# Altium PCB LKS_Motor_0406.PcbDoc (part 4 of 4)
Units mm, origin at the board's own origin, x right, y up, seen from the top; angles counter-clockwise.
Board outline 117 x 10 mm, 2 copper layers (Top Layer, Bottom Layer); 114 components, 77 nets, 340 pads, 169 vias.
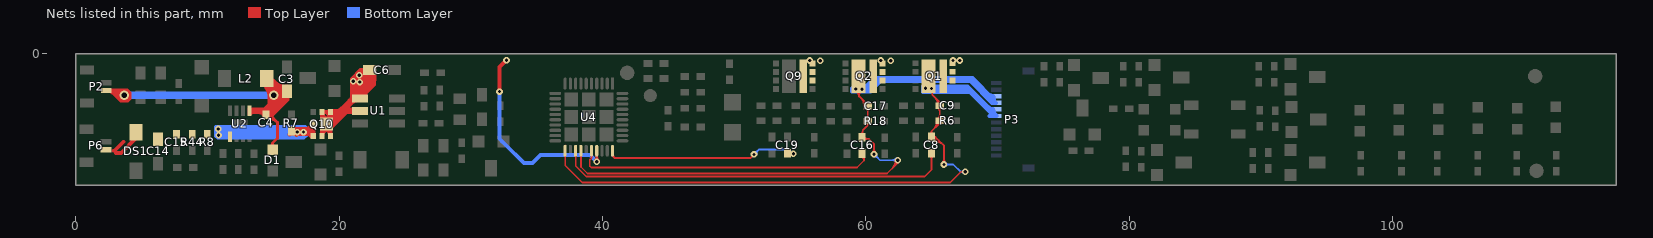
[diagram p4: the nets of this part, all layers, seen from the top]

## Via types
v1: diameter 0.5, hole 0.25, Top Layer to Bottom Layer, 167 vias
v2: diameter 0.7, hole 0.4, Top Layer to Bottom Layer, 2 vias

## Nets (pads, with @x,y where several pads share a name; then routed paths per layer and width w, separated by ;. In a path a pad name is that pad's centre, name@x,y a point inside that pad or via, vN(x,y) a via of type N, cw(c..) or ccw(c..) an arc to the next point about the centre after c; other vN are vias at no path point) (continued)
V: C16.1 C17.1 P3.3 P3.4 Q2.10 R18.2 U4.24 | length 121.5
  Top Layer w0.127: U4.24@38.367,-7.361 38.367,-8.598 38.862,-9.093 61.62,-9.093 62.433,-8.28 v1(62.433,-8.077) ; C16.1@59.866,-6.35 C16.1@59.866,-6.366 ; C16.1@59.882,-6.35 C16.1@59.866,-6.366 ; v1(60.63,-7.62) 60.63,-6.833 60.274,-6.477 ; 38.367,-7.827 cw(c38.503,-7.827) 38.407,-7.731 ccw(c38.503,-7.827) 38.367,-7.827 ; 38.367,-7.827 ccw(c38.231,-7.827) 38.327,-7.731 cw(c38.231,-7.827) 38.367,-7.827 ; 59.464,-3.178 cw(c59.802,-3.178) 59.661,-2.871 ccw(c59.802,-3.178) 59.464,-3.178 ; 59.464,-3.178 ccw(c59.126,-3.178) 59.267,-2.871 cw(c59.126,-3.178) 59.464,-3.178 ; 59.464,-3.178 60.146,-3.859 C17.1@60.146,-3.978 R18.2@60.146,-5.121 60.146,-5.436 ; 59.464,-3.178 Q2.10@59.464,-1.707 ; 59.464,-2.979 cw(c59.711,-2.979) 59.607,-2.755 ccw(c59.711,-2.979) 59.464,-2.979 ; 59.464,-2.979 ccw(c59.217,-2.979) 59.321,-2.755 cw(c59.217,-2.979) 59.464,-2.979 ; Q2.10@59.464,-1.707 ccw(c60.605,-1.707) 59.84,-2.554 cw(c60.605,-1.707) Q2.10@59.464,-1.707 ; Q2.10@59.464,-1.707 cw(c58.339,-1.707) 59.106,-2.53 ccw(c58.339,-1.707) Q2.10@59.464,-1.707 ; 59.765,-5.817 cw(c59.399,-5.817) 59.607,-6.117 ccw(c59.399,-5.817) 59.765,-5.817 ; 59.765,-5.817 60.146,-5.436 ; 59.765,-5.817 59.765,-6.264 C16.1@59.866,-6.366 ; 59.978,-6.477 cw(c59.978,-6.404) 59.905,-6.41 ccw(c59.978,-6.404) 59.978,-6.477 ; 59.978,-6.477 ccw(c59.978,-6.602) 59.873,-6.532 cw(c59.978,-6.602) 59.978,-6.477 ; 59.978,-6.477 60.274,-6.477 ; 60.146,-5.436 cw(c60.31,-5.436) 60.234,-5.29 ccw(c60.31,-5.436) 60.146,-5.436 ; 60.146,-5.436 ccw(c59.981,-5.436) 60.057,-5.29 cw(c59.981,-5.436) 60.146,-5.436 ; 60.146,-4.661 cw(c59.686,-4.661) 60.011,-4.986 ccw(c59.686,-4.661) 60.146,-4.661 ; 60.146,-4.661 ccw(c60.606,-4.661) 60.28,-4.986 cw(c60.606,-4.661) 60.146,-4.661 ; 60.146,-4.438 cw(c60.606,-4.438) 60.28,-4.113 ccw(c60.606,-4.438) 60.146,-4.438 ; 60.146,-4.438 ccw(c59.686,-4.438) 60.011,-4.113 cw(c59.686,-4.438) 60.146,-4.438 ; 60.274,-6.477 cw(c60.274,-5.9) 59.854,-6.296 ccw(c60.274,-5.9) 60.274,-6.477 ; 60.63,-7.17 cw(c60.18,-7.17) 60.498,-7.488 ccw(c60.18,-7.17) 60.63,-7.17 ; 60.63,-7.17 ccw(c61.08,-7.17) 60.762,-7.488 cw(c61.08,-7.17) 60.63,-7.17 ; Q2.10@59.179,-2.846 cw(c59.066,-3.228) 59.464,-3.228 ccw(c59.066,-3.228) Q2.10@59.179,-2.846 ; Q2.10@59.192,-2.623 ccw(c58.611,-1.999) 59.464,-1.999 cw(c58.611,-1.999) Q2.10@59.192,-2.623 ; Q2.10@59.216,-2.724 cw(c59.116,-3.057) 59.464,-3.057 ccw(c59.116,-3.057) Q2.10@59.216,-2.724 ; Q2.10@59.252,-2.602 cw(c59.167,-2.887) 59.464,-2.887 ccw(c59.167,-2.887) Q2.10@59.252,-2.602 ; Q2.10@59.279,-2.716 ccw(c58.883,-2.291) 59.464,-2.291 cw(c58.883,-2.291) Q2.10@59.279,-2.716 ; 59.464,-3.239 cw(c59.837,-3.239) 59.756,-2.874 ccw(c59.837,-3.239) 59.464,-3.239 ; 59.464,-3.08 cw(c59.802,-3.08) 59.728,-2.75 ccw(c59.802,-3.08) 59.464,-3.08 ; Q2.10@59.464,-2.922 cw(c59.767,-2.922) 59.701,-2.627 ccw(c59.767,-2.922) Q2.10@59.464,-2.922 ; Q2.10@59.464,-2.85 ccw(c59.573,-2.85) 59.5,-2.931 cw(c59.573,-2.85) Q2.10@59.464,-2.85 ; Q2.10@59.464,-2.763 cw(c59.731,-2.763) 59.673,-2.503 ccw(c59.731,-2.763) Q2.10@59.464,-2.763 ; Q2.10@59.464,-2.605 cw(c59.696,-2.605) 59.645,-2.379 ccw(c59.696,-2.605) Q2.10@59.464,-2.605 ; Q2.10@59.464,-2.564 ccw(c59.831,-2.564) 59.585,-2.837 cw(c59.831,-2.564) Q2.10@59.464,-2.564 ; Q2.10@59.464,-2.279 ccw(c60.089,-2.279) 59.67,-2.743 cw(c60.089,-2.279) Q2.10@59.464,-2.279 ; Q2.10@59.464,-1.993 ccw(c60.347,-1.993) 59.755,-2.648 cw(c60.347,-1.993) Q2.10@59.464,-1.993 ; 59.606,-3.32 cw(c58.948,-3.978) 59.879,-3.978 ccw(c58.948,-3.978) 59.606,-3.32 ; C16.1@59.762,-6.383 ccw(c59.98,-6.177) 59.98,-6.477 cw(c59.98,-6.177) C16.1@59.762,-6.383 ; 59.765,-5.933 ccw(c60.057,-5.933) 59.85,-6.139 cw(c60.057,-5.933) 59.765,-5.933 ; 59.823,-3.537 cw(c59.382,-3.978) 60.006,-3.978 ccw(c59.382,-3.978) 59.823,-3.537 ; C16.1@59.85,-6.561 cw(c60.053,-6.763) 60.053,-6.477 ccw(c60.053,-6.763) C16.1@59.85,-6.561 ; 61.971,-8.742 ccw(c61.306,-8.077) 62.247,-8.077 cw(c61.306,-8.077) 61.971,-8.742 ; 62.188,-8.526 ccw(c61.739,-8.077) 62.374,-8.077 cw(c61.739,-8.077) 62.188,-8.526
  Bottom Layer w0.127: v1(60.63,-7.62) 61.087,-8.077 v1(62.433,-8.077) ; 60.948,-7.938 cw(c61.267,-7.62) 60.816,-7.62 ccw(c61.267,-7.62) 60.948,-7.938 ; 60.948,-7.938 ccw(c60.63,-8.257) 60.63,-7.806 cw(c60.63,-8.257) 60.948,-7.938 ; 61.983,-8.077 cw(c61.983,-8.527) 62.301,-8.209 ccw(c61.983,-8.527) 61.983,-8.077 ; 61.983,-8.077 ccw(c61.983,-7.627) 62.301,-7.945 cw(c61.983,-7.627) 61.983,-8.077
  Bottom Layer w0.3: v1@59.258,-2.692 60.173,-2.692 ; 61.214,-2.083 61.138,-2.083 60.35,-2.87 ; 65.583,-2.083 65.38,-2.083 ; 67.716,-2.083 67.31,-2.083 ; 68.297,-2.083 67.945,-2.083 ; 68.682,-2.642 69.262,-3.222 ; 68.834,-2.794 67.894,-1.854 ; P3.3@69.647,-3.222 69.262,-3.222 ; P3.4@69.901,-3.722 P3.4@69.762,-3.722 ; 59.131,-2.438 cw(c59.131,-2.997) 59.627,-2.739 ccw(c59.131,-2.997) 59.131,-2.438 ; 59.131,-2.438 58.953,-2.616 58.953,-2.87 60.35,-2.87 ; 59.131,-2.438 60.071,-2.438 ; v1@59.304,-2.596 ccw(c59.965,-1.935) 59.965,-2.87 cw(c59.965,-1.935) v1@59.304,-2.596 ; v1@59.304,-2.596 ccw(c59.536,-2.364) 59.536,-2.692 cw(c59.536,-2.364) v1@59.304,-2.596 ; 60.071,-2.438 ccw(c60.071,-2.694) 59.815,-2.693 cw(c60.071,-2.694) 60.071,-2.438 ; 60.071,-2.438 60.071,-2.591 60.173,-2.692 ; 60.071,-2.438 60.655,-1.854 65.71,-1.854 67.615,-1.854 ; 60.173,-2.692 60.782,-2.083 65.38,-2.083 ; 60.35,-2.87 cw(c60.35,-2.106) 59.789,-2.625 ccw(c60.35,-2.106) 60.35,-2.87 ; 65.38,-2.083 67.31,-2.083 ; 67.31,-2.083 67.945,-2.083 ; 67.615,-1.854 68.097,-1.854 69.762,-3.518 P3.4@69.762,-3.722 ; 67.615,-1.854 67.894,-1.854 ; 67.894,-1.854 69.262,-3.222 ; 67.945,-2.083 69.584,-3.722 P3.4@69.762,-3.722 ; 69.262,-3.222 P3.4@69.762,-3.722 ; 69.301,-3.058 ccw(c69.66,-2.7) P3.3@69.66,-3.207 ; 69.301,-3.058 ccw(c69.66,-2.7) P3.3@69.66,-3.207 ; 69.301,-3.058 ccw(c69.66,-2.7) P3.3@69.66,-3.207 ; 69.301,-3.058 ccw(c69.66,-2.7) P3.3@69.66,-3.207 ; P3.4@69.644,-3.722 ccw(c68.871,-3.722) 69.418,-3.175 cw(c68.871,-3.722) P3.4@69.644,-3.722 ; P3.4@69.644,-3.722 ccw(c69.361,-3.722) 69.562,-3.522 cw(c69.361,-3.722) P3.4@69.644,-3.722 ; P3.3@69.649,-3.232 cw(c69.377,-3.505) 69.762,-3.505 ; P3.3@69.649,-3.232 cw(c69.377,-3.505) 69.762,-3.505 ; P3.3@69.649,-3.232 cw(c69.377,-3.505) 69.762,-3.505 ; P3.3@69.649,-3.232 cw(c69.377,-3.505) 69.762,-3.505 ; 59.045,-2.87 ccw(c59.045,-2.022) 59.645,-2.622 cw(c59.045,-2.022) 59.045,-2.87 ; v1@59.304,-2.738 cw(c60.026,-3.46) 60.026,-2.438 ccw(c60.026,-3.46) v1@59.304,-2.738 ; v1@59.515,-2.692 cw(c59.77,-2.693) 59.77,-2.438 ccw(c59.77,-2.693) v1@59.515,-2.692 ; v1@59.6,-2.529 cw(c59.801,-2.814) 60.048,-2.567 ccw(c59.801,-2.814) v1@59.6,-2.529 ; 59.626,-2.438 cw(c59.626,-2.739) 59.893,-2.6 ccw(c59.626,-2.739) 59.626,-2.438 ; v1@59.642,-2.506 cw(c59.79,-2.884) 60.077,-2.597 ccw(c59.79,-2.884) v1@59.642,-2.506 ; v1@59.773,-2.774 cw(c60.009,-3.11) 60.3,-2.819 ccw(c60.009,-3.11) v1@59.773,-2.774 ; 69.467,-3.427 ccw(c69.66,-3.233) 69.662,-3.506 cw(c69.66,-3.233) 69.467,-3.427 ; P3.4@69.505,-3.642 ccw(c69.66,-3.487) 69.66,-3.707 cw(c69.66,-3.487) P3.4@69.505,-3.642
  other v1: 59.715,-2.692 59.233,-2.667
VB1: C19.2 U4.30 | length 19.3
  Top Layer w0.15: U4.30@40.767,-7.208 40.767,-7.747 40.919,-7.899 51.257,-7.899 v1(51.511,-7.645) ; C19.2@54.051,-7.544 cw(c54.051,-7.945) 54.369,-7.701 ccw(c54.051,-7.945) C19.2@54.051,-7.544 ; C19.2@54.051,-7.544 v1@54.458,-7.544 ; v1@54.458,-7.544 cw(c54.458,-7.172) 54.183,-7.423 ccw(c54.458,-7.172) v1@54.458,-7.544 ; v1@54.458,-7.544 ccw(c54.458,-7.916) 54.183,-7.665 cw(c54.458,-7.916) v1@54.458,-7.544 ; U4.30@40.812,-7.691 ccw(c41.057,-7.691) 40.884,-7.864 cw(c41.057,-7.691) U4.30@40.812,-7.691 ; C19.2@54.209,-7.544 ccw(c54.209,-7.295) 54.385,-7.471 cw(c54.209,-7.295) C19.2@54.209,-7.544
  Bottom Layer w0.127: v1(51.511,-7.645) 51.892,-7.264 54.178,-7.264 v1(54.508,-7.595) ; 51.83,-7.327 cw(c51.511,-7.009) 51.511,-7.459 ccw(c51.511,-7.009) 51.83,-7.327 ; 51.83,-7.327 ccw(c52.148,-7.645) 51.698,-7.645 cw(c52.148,-7.645) 51.83,-7.327
VB2: C16.2 U4.26 | length 26.4
  Top Layer w0.127: U4.26@39.167,-7.208 39.167,-7.925 39.04,-8.052 39.04,-8.534 39.141,-8.636 59.333,-8.636 59.866,-8.103 C16.2@59.866,-7.636 ; 39.167,-7.827 cw(c39.303,-7.827) 39.207,-7.731 ccw(c39.303,-7.827) 39.167,-7.827 ; 39.167,-7.827 ccw(c39.031,-7.827) 39.127,-7.731 cw(c39.031,-7.827) 39.167,-7.827 ; C16.2@59.652,-7.825 cw(c59.547,-8.127) 59.866,-8.127 ccw(c59.547,-8.127) C16.2@59.652,-7.825 ; C16.2@59.694,-7.705 cw(c59.609,-7.948) 59.866,-7.948 ccw(c59.609,-7.948) C16.2@59.694,-7.705
  Top Layer w0.15: 59.866,-8.026 C16.2@59.866,-7.636 ; C16.2@59.677,-7.82 cw(c59.626,-8.055) 59.866,-8.055 ccw(c59.626,-8.055) C16.2@59.677,-7.82 ; C16.2@59.709,-7.674 cw(c59.667,-7.869) 59.866,-7.869 ccw(c59.667,-7.869) C16.2@59.709,-7.674
VB3: C8.2 U4.23 | length 31.9
  Top Layer w0.127: U4.23@37.967,-7.361 37.967,-8.528 38.76,-9.322 64.491,-9.322 64.999,-8.814 C8.2@64.999,-7.544 ; 37.967,-7.827 cw(c38.103,-7.827) 38.007,-7.731 ccw(c38.103,-7.827) 37.967,-7.827 ; 37.967,-7.827 ccw(c37.831,-7.827) 37.927,-7.731 cw(c37.831,-7.827) 37.967,-7.827 ; 64.999,-8.08 cw(c65.459,-8.08) 65.133,-7.755 ccw(c65.459,-8.08) 64.999,-8.08 ; 64.999,-8.08 ccw(c64.539,-8.08) 64.864,-7.755 cw(c64.539,-8.08) 64.999,-8.08
VBAT_8V4: C14.2 C15.2 DS1.1 P6.2 Q10.4 Q10.8 R7.2 R8.2 R44.1 U2.5 | length 103.4
  Top Layer w0.3: 2.845,-7.366 2.946,-7.366 3.632,-6.68 ; 3.048,-7.518 3.454,-7.518 4.572,-6.401 DS1.1@4.572,-5.942 ; R7.2@16.243,-6.134 cw(c16.581,-6.472) v1@16.774,-6.035 ; R7.2@16.322,-6.056 R7.2@16.434,-5.944 ; R7.2@16.383,-5.867 17.653,-5.867 ; R7.2@16.396,-6.047 cw(c16.452,-6.484) v1@16.764,-6.172 ; R7.2@16.535,-5.944 v1@16.688,-6.096 ; 17.562,-5.944 R7.2@16.434,-5.944 ; Q10.4@17.867,-6.259 17.704,-6.096 ; R7.2@16.434,-5.944 16.663,-5.715 ; R7.2@16.434,-5.944 v1(16.815,-5.944) v1@16.967,-6.096 ; 16.663,-5.715 cw(c16.663,-6.392) 17.216,-6.001 ccw(c16.663,-6.392) 16.663,-5.715 ; 16.663,-5.715 ccw(c16.663,-5.918) 16.478,-5.834 cw(c16.663,-5.918) 16.663,-5.715 ; 16.663,-5.715 17.805,-5.715 ; v1@16.688,-6.096 ccw(c16.688,-5.334) 17.227,-5.873 cw(c16.688,-5.334) v1@16.688,-6.096 ; v1@16.688,-6.096 cw(c16.688,-5.891) 16.485,-5.926 ccw(c16.688,-5.891) v1@16.688,-6.096 ; v1@16.688,-6.096 v1@16.967,-6.096 ; v1@16.886,-6.014 cw(c17.608,-6.737) 17.608,-5.715 ccw(c17.608,-6.737) v1@16.886,-6.014 ; v1@16.886,-6.014 cw(c17.24,-6.369) 17.24,-5.867 ccw(c17.24,-6.369) v1@16.886,-6.014 ; v1@16.967,-6.096 cw(c16.967,-5.406) 16.46,-5.873 ccw(c16.967,-5.406) v1@16.967,-6.096 ; v1@16.967,-6.096 17.704,-6.096 ; 17.653,-5.867 ccw(c17.653,-6.214) 17.377,-6.004 cw(c17.653,-6.214) 17.653,-5.867 ; 17.653,-5.867 cw(c17.508,-5.722) 17.366,-5.871 ccw(c17.508,-5.722) 17.653,-5.867 ; 17.653,-5.867 17.805,-5.715 ; 17.653,-5.867 Q10.4@18.044,-6.259 ; 17.704,-6.096 cw(c17.704,-5.743) 17.387,-5.899 ccw(c17.704,-5.743) 17.704,-6.096 ; 17.704,-6.096 cw(c17.704,-6.449) 18.002,-6.261 ccw(c17.704,-6.449) 17.704,-6.096 ; 17.805,-5.715 ccw(c17.805,-6.172) 17.389,-5.985 cw(c17.805,-6.172) 17.805,-5.715 ; 17.805,-5.715 cw(c17.448,-5.358) 17.322,-5.847 ccw(c17.448,-5.358) 17.805,-5.715 ; 17.805,-5.715 18.044,-5.954 Q10.4@18.044,-6.259 ; 17.805,-5.715 18.044,-5.476 Q10.8@18.044,-5.334 Q10.4@18.044,-6.259 ; R7.2@16.389,-5.867 cw(c16.389,-6.369) 16.744,-6.014 ccw(c16.389,-6.369) R7.2@16.389,-5.867 ; R7.2@16.457,-5.865 cw(c16.818,-6.227) 16.818,-5.715 ccw(c16.818,-6.227) R7.2@16.457,-5.865 ; R7.2@16.532,-5.846 cw(c16.785,-6.099) 16.852,-5.747 ccw(c16.785,-6.099) R7.2@16.532,-5.846 ; R7.2@16.553,-5.825 cw(c16.771,-6.043) 16.896,-5.761 ccw(c16.771,-6.043) R7.2@16.553,-5.825 ; v1@16.872,-5.867 cw(c16.872,-6.369) 17.227,-6.014 ccw(c16.872,-6.369) v1@16.872,-5.867 ; v1@16.886,-5.873 ccw(c17.424,-5.334) 17.424,-6.096 cw(c17.424,-5.334) v1@16.886,-5.873 ; v1@17.189,-5.775 cw(c17.37,-6.056) 17.605,-5.82 ccw(c17.37,-6.056) v1@17.189,-5.775 ; v1@17.297,-5.744 cw(c17.297,-6.303) 17.693,-5.907 ccw(c17.297,-6.303) v1@17.297,-5.744 ; v1@17.318,-5.715 ccw(c17.318,-4.738) 18.009,-5.429 cw(c17.318,-4.738) v1@17.318,-5.715 ; v1@17.352,-6.028 cw(c17.576,-6.376) 17.869,-6.083 ccw(c17.576,-6.376) v1@17.352,-6.028 ; 17.59,-6.096 cw(c17.59,-6.688) 18.009,-6.269 ccw(c17.59,-6.688) 17.59,-6.096 ; 17.761,-5.671 cw(c17.198,-6.234) 17.994,-6.234 ccw(c17.198,-6.234) 17.761,-5.671
  Bottom Layer w0.3: 10.643,-5.944 v1(17.297,-5.944) ; v1(10.82,-5.715) 17.551,-5.715 ; v1(10.846,-6.198) 17.475,-6.198 ; 17.526,-6.147 17.297,-6.375 10.795,-6.375 10.643,-6.223 v1@10.643,-5.563 ; v1@10.643,-5.563 ccw(c11.359,-5.563) 10.909,-6.12 cw(c11.359,-5.563) v1@10.643,-5.563 ; v1@10.643,-5.563 17.399,-5.563 ; v1@16.744,-6.014 ccw(c16.021,-6.737) 16.021,-5.715 cw(c16.021,-6.737) v1@16.744,-6.014 ; v1@16.744,-6.014 ccw(c15.654,-7.105) 15.654,-5.563 cw(c15.654,-7.105) v1@16.744,-6.014 ; v1@17.227,-6.014 ccw(c16.504,-6.737) 16.504,-5.715 cw(c16.504,-6.737) v1@17.227,-6.014 ; v1@17.227,-6.014 ccw(c16.136,-7.105) 16.136,-5.563 cw(c16.136,-7.105) v1@17.227,-6.014 ; 17.399,-5.563 ccw(c17.399,-6.058) 16.913,-5.963 cw(c17.399,-6.058) 17.399,-5.563 ; 17.399,-5.563 17.577,-5.74 17.577,-6.096 17.475,-6.198 ; 17.475,-6.198 cw(c17.475,-5.505) 16.898,-5.888 ccw(c17.475,-5.505) 17.475,-6.198 ; 17.551,-5.715 ccw(c17.551,-6.605) 16.889,-6.01 cw(c17.551,-6.605) 17.551,-5.715 ; v1@10.643,-6.253 cw(c11.203,-6.253) 10.878,-5.797 ccw(c11.203,-6.253) v1@10.643,-6.253 ; v1@10.704,-6.056 cw(c10.976,-6.328) 10.976,-5.944 ccw(c10.976,-6.328) v1@10.704,-6.056 ; v1@10.891,-5.786 cw(c11.43,-6.324) 11.43,-5.563 ccw(c11.43,-6.324) v1@10.891,-5.786 ; v1@10.891,-5.644 ccw(c11.614,-4.922) 11.614,-5.944 cw(c11.614,-4.922) v1@10.891,-5.644 ; v1@10.917,-6.268 cw(c11.7,-7.052) 11.7,-5.944 ccw(c11.7,-7.052) v1@10.917,-6.268 ; v1@10.917,-6.127 ccw(c11.516,-5.527) 11.516,-6.375 cw(c11.516,-5.527) v1@10.917,-6.127 ; 15.96,-6.198 ccw(c15.96,-5.089) 16.744,-5.873 cw(c15.96,-5.089) 15.96,-6.198 ; 16.378,-5.563 cw(c16.378,-6.381) 16.956,-5.802 ccw(c16.378,-6.381) 16.378,-5.563 ; 16.443,-6.198 ccw(c16.443,-5.089) 17.227,-5.873 cw(c16.443,-5.089) 16.443,-6.198 ; v1@16.619,-5.905 cw(c17.035,-5.987) 17.035,-5.563 ccw(c17.035,-5.987) v1@16.619,-5.905 ; v1@16.648,-6.054 ccw(c16.916,-5.877) 16.916,-6.198 cw(c16.916,-5.877) v1@16.648,-6.054 ; 16.684,-6.198 ccw(c16.684,-5.813) 16.956,-6.085 cw(c16.684,-5.813) 16.684,-6.198 ; 16.86,-5.563 cw(c16.86,-6.381) 17.439,-5.802 ccw(c16.86,-6.381) 16.86,-5.563 ; 17.167,-6.198 ccw(c17.167,-5.813) 17.439,-6.085 cw(c17.167,-5.813) 17.167,-6.198 ; 17.417,-5.58 cw(c17.151,-5.846) 17.464,-6.054 ccw(c17.151,-5.846) 17.417,-5.58
VCC: C6.2 Q1.2 Q1.3 Q1.4 Q1.9 Q2.2 Q2.3 Q2.4 Q2.9 Q9.2 Q9.3 Q9.4 Q9.9 Q10.1 Q10.2 Q10.5 Q10.6 Q10.7 U1.4 U1.5 U4.27 | length 145.4
  Top Layer w0.2: v1@39.567,-8.096 U4.27@39.567,-7.361 ; v1@39.467,-8.098 ccw(c39.226,-7.857) 39.567,-7.857 cw(c39.226,-7.857) v1@39.467,-8.098 ; 39.567,-7.827 ccw(c39.95,-7.827) 39.679,-8.098 cw(c39.95,-7.827) 39.567,-7.827
  Top Layer w0.3: Q10.5@18.694,-6.259 Q10.2@18.694,-4.409 ; Q10.7@18.867,-5.162 Q10.7@18.867,-5.334 ; Q10.7@18.974,-5.613 Q10.7@19.075,-5.613 ; Q10.7@19.082,-4.946 ccw(c18.57,-4.434) Q10.1@19.294,-4.434 ; Q10.7@19.094,-5.324 cw(c20.036,-5.324) 19.37,-4.658 ; Q10.1@19.232,-4.343 19.167,-4.409 Q10.2@18.694,-4.409 ; Q10.6@19.344,-6.259 Q10.7@19.344,-5.613 ; Q10.1@19.344,-4.634 ccw(c19.344,-4.513) Q10.1@19.43,-4.599 ; 20.345,-4.216 U1.5@21.587,-4.216 ; 21.158,-2.896 21.336,-2.718 ; U1.4@21.181,-3.287 cw(c20.925,-3.031) 20.925,-3.393 cw(c20.925,-3.756) U1.4@21.181,-3.499 ; U1.5@21.587,-4.42 20.803,-4.42 20.574,-4.42 ; v1@32.283,-2.87 v1(32.182,-2.87) 32.182,-1.016 v1(32.715,-0.483) ; Q10.2@18.694,-4.409 ccw(c19.292,-4.409) 19.136,-4.986 cw(c19.292,-4.409) Q10.2@18.694,-4.409 ; Q10.7@18.867,-5.334 18.867,-5.136 19.66,-4.343 ; Q10.7@18.867,-5.334 19.075,-5.334 19.075,-5.283 20.218,-4.14 ; Q10.7@19.075,-5.613 19.38,-5.613 20.574,-4.42 ; Q10.7@19.075,-5.613 20.142,-4.547 ; Q10.1@19.294,-4.434 cw(c18.631,-4.434) 19.1,-4.903 ccw(c18.631,-4.434) Q10.1@19.294,-4.434 ; 19.66,-4.343 cw(c19.517,-4.201) 19.379,-4.348 ccw(c19.517,-4.201) 19.66,-4.343 ; 19.66,-4.343 ccw(c20.367,-5.051) 19.387,-5.253 cw(c20.367,-5.051) 19.66,-4.343 ; 19.66,-4.343 20.345,-4.42 ; 20.142,-4.547 cw(c19.108,-3.512) 19.057,-4.974 ccw(c19.108,-3.512) 20.142,-4.547 ; 20.142,-4.547 21.295,-3.393 U1.4@21.587,-3.393 ; 20.142,-4.547 20.345,-4.42 ; 20.218,-4.14 cw(c19.633,-3.555) 19.361,-4.337 ccw(c19.633,-3.555) 20.218,-4.14 ; 20.218,-4.14 20.965,-3.393 ; 20.345,-4.42 20.574,-4.42 ; 20.965,-3.393 cw(c20.965,-3.664) U1.4@21.172,-3.49 ; 20.965,-3.393 ccw(c20.965,-3.123) U1.4@21.172,-3.297 ; 20.965,-3.393 cw(c20.965,-3.664) U1.4@21.172,-3.49 ; 20.965,-3.393 ccw(c20.965,-3.123) U1.4@21.172,-3.297 ; 20.965,-3.393 cw(c20.965,-3.664) U1.4@21.172,-3.49 ; 20.965,-3.393 ccw(c20.965,-3.123) U1.4@21.172,-3.297 ; 20.965,-3.393 cw(c20.965,-3.664) U1.4@21.172,-3.49 ; 20.965,-3.393 ccw(c20.965,-3.123) U1.4@21.172,-3.297 ; 20.965,-3.393 20.965,-1.92 21.641,-1.245 ; 20.965,-3.393 21.089,-3.393 21.587,-2.896 ; 20.965,-3.393 U1.4@21.587,-3.393 ; 21.069,-2.985 ccw(c21.33,-2.985) 21.303,-3.244 cw(c21.33,-2.985) 21.069,-2.985 ; 21.069,-2.984 21.069,-2.515 ; 21.069,-2.515 ccw(c22.153,-2.515) 21.392,-3.287 cw(c22.153,-2.515) 21.069,-2.515 ; 21.069,-2.515 21.139,-2.445 C6.2@22.339,-1.245 ; 21.069,-2.515 v1(21.069,-2.095) C6.2@21.92,-1.245 ; v1@21.069,-2.295 ccw(c21.069,-1.767) 21.443,-2.141 cw(c21.069,-1.767) v1@21.069,-2.295 ; v1@21.069,-2.295 ccw(c21.069,-1.429) 21.682,-2.042 cw(c21.069,-1.429) v1@21.069,-2.295 ; v1@21.069,-1.996 ccw(c21.069,-0.742) 21.955,-1.628 cw(c21.069,-0.742) v1@21.069,-1.996 ; v1@21.069,-1.996 ccw(c21.069,-0.405) 22.194,-1.53 cw(c21.069,-0.405) v1@21.069,-1.996 ; U1.4@21.181,-3.499 cw(c21.702,-2.979) 20.965,-2.979 ccw(c21.702,-2.979) U1.4@21.181,-3.499 ; U1.4@21.287,-3.543 ccw(c21.287,-3.885) 21.045,-3.644 cw(c21.287,-3.885) U1.4@21.287,-3.543 ; U1.4@21.287,-3.543 ccw(c21.287,-4.682) 20.482,-3.877 cw(c21.287,-4.682) U1.4@21.287,-3.543 ; 21.336,-2.718 21.336,-2.388 C6.2@22.339,-1.384 ; 21.336,-2.718 v1@21.768,-2.286 ; U1.4@21.481,-3.287 ccw(c21.225,-3.031) 21.587,-3.031 ; U1.4@21.481,-3.287 ccw(c21.225,-3.031) 21.587,-3.031 ; U1.4@21.481,-3.287 ccw(c21.225,-3.031) 21.587,-3.031 ; U1.4@21.481,-3.287 ccw(c21.225,-3.031) 21.587,-3.031 ; v1@21.505,-2.219 cw(c21.307,-2.417) 21.587,-2.417 ccw(c21.307,-2.417) v1@21.505,-2.219 ; v1@21.505,-2.219 cw(c20.871,-2.853) 21.768,-2.853 ccw(c20.871,-2.853) v1@21.505,-2.219 ; U1.4@21.587,-3.393 22.079,-2.902 ; U1.4@21.587,-3.393 21.587,-2.721 22.454,-1.854 ; U1.4@21.587,-3.393 21.587,-2.896 ; U1.4@21.587,-3.393 21.768,-3.213 v1@21.768,-2.286 ; 21.587,-3.031 ccw(c21.949,-3.031) U1.4@21.693,-3.287 ; 21.587,-3.031 ccw(c21.949,-3.031) U1.4@21.693,-3.287 ; 21.587,-3.031 ccw(c21.949,-3.031) U1.4@21.693,-3.287 ; 21.587,-3.031 ccw(c21.949,-3.031) U1.4@21.693,-3.287 ; 21.587,-2.896 21.742,-2.896 22.073,-2.565 ; 21.587,-2.896 21.587,-2.467 v1@21.768,-2.286 ; 21.641,-1.245 ccw(c21.827,-1.431) 21.61,-1.581 cw(c21.827,-1.431) 21.641,-1.245 ; 21.641,-1.245 C6.2@21.92,-1.245 ; 21.655,-1.245 cw(c21.655,-1.802) 22.049,-1.408 ccw(c21.655,-1.802) 21.655,-1.245 ; 21.655,-1.245 ccw(c21.655,-0.687) 22.049,-1.081 cw(c21.655,-0.687) 21.655,-1.245 ; v1@21.768,-2.286 22.123,-1.93 ; C6.2@21.92,-1.245 ccw(c22.58,-1.905) 21.673,-2.124 cw(c22.58,-1.905) C6.2@21.92,-1.245 ; C6.2@21.92,-1.245 C6.2@22.339,-1.245 ; C6.2@21.981,-1.245 cw(c21.117,-1.245) 21.728,-1.856 ccw(c21.117,-1.245) C6.2@21.981,-1.245 ; C6.2@21.981,-1.245 cw(c20.78,-1.245) 21.629,-2.094 ccw(c20.78,-1.245) C6.2@21.981,-1.245 ; 22.073,-2.565 22.682,-1.956 ; 22.073,-2.565 22.454,-2.184 22.454,-1.854 ; 22.079,-2.902 ccw(c22.329,-3.152) 22.019,-3.321 cw(c22.329,-3.152) 22.079,-2.902 ; 22.079,-2.902 22.657,-2.324 22.657,-1.981 22.682,-1.956 ; 22.123,-1.93 cw(c21.766,-1.573) 21.607,-2.053 ccw(c21.766,-1.573) 22.123,-1.93 ; 22.123,-1.93 22.123,-1.46 C6.2@22.339,-1.245 ; 22.123,-1.93 22.339,-1.714 ; 22.339,-1.714 cw(c22.702,-1.714) 22.48,-1.428 ccw(c22.702,-1.714) 22.339,-1.714 ; 22.339,-1.714 ccw(c21.977,-1.714) 22.198,-1.428 cw(c21.977,-1.714) 22.339,-1.714 ; 22.339,-1.714 C6.2@22.339,-1.245 ; C6.2@22.339,-1.384 cw(c21.83,-0.875) 21.564,-1.544 ccw(c21.83,-0.875) C6.2@22.339,-1.384 ; C6.2@22.339,-1.384 C6.2@22.339,-1.245 ; C6.2@22.339,-1.245 cw(c21.623,-0.528) 21.536,-1.538 ccw(c21.623,-0.528) C6.2@22.339,-1.245 ; C6.2@22.339,-1.245 22.682,-1.587 22.682,-1.956 ; C6.2@22.339,-1.245 22.454,-1.359 22.454,-1.854 ; Q10.5@18.694,-6.324 cw(c19.38,-6.324) 19.158,-5.675 ccw(c19.38,-6.324) Q10.5@18.694,-6.324 ; 18.694,-5.904 cw(c19.236,-5.904) 19.061,-5.391 ccw(c19.236,-5.904) 18.694,-5.904 ; 18.694,-4.801 ccw(c19.186,-4.801) 19.057,-5.276 cw(c19.186,-4.801) 18.694,-4.801 ; Q10.7@18.914,-5.669 cw(c18.656,-6.307) 19.344,-6.307 ccw(c18.656,-6.307) Q10.7@18.914,-5.669 ; Q10.7@19.026,-5.39 cw(c18.835,-5.862) 19.344,-5.862 ccw(c18.835,-5.862) Q10.7@19.026,-5.39 ; Q10.7@19.044,-4.974 ccw(c19.044,-4.153) 19.625,-4.733 cw(c19.044,-4.153) Q10.7@19.044,-4.974 ; Q10.7@19.046,-5.274 ccw(c19.075,-4.455) 19.654,-5.034 cw(c19.075,-4.455) Q10.7@19.046,-5.274 ; Q10.7@19.093,-5.314 cw(c19.715,-5.186) 19.266,-4.737 ccw(c19.715,-5.186) Q10.7@19.093,-5.314 ; Q10.1@19.173,-4.566 ccw(c19.305,-4.426) 19.441,-4.562 cw(c19.305,-4.426) Q10.1@19.173,-4.566 ; Q10.1@19.262,-4.62 ccw(c19.458,-4.057) 19.88,-4.478 cw(c19.458,-4.057) Q10.1@19.262,-4.62 ; Q10.1@19.376,-4.448 cw(c19.664,-4.809) 19.715,-4.35 ccw(c19.664,-4.809) Q10.1@19.376,-4.448 ; Q10.1@19.376,-4.423 cw(c19.611,-4.717) 19.653,-4.343 ccw(c19.611,-4.717) Q10.1@19.376,-4.423 ; Q10.7@19.394,-5.324 cw(c20.263,-5.324) 19.649,-4.71 ccw(c20.263,-5.324) Q10.7@19.394,-5.324 ; 20.618,-4.216 cw(c20.618,-5.012) 21.181,-4.449 ccw(c20.618,-5.012) 20.618,-4.216 ; 20.741,-4.42 ccw(c20.741,-3.797) 21.181,-4.237 cw(c20.741,-3.797) 20.741,-4.42 ; 20.804,-3.554 cw(c21.026,-3.776) 21.202,-3.517 ccw(c21.026,-3.776) 20.804,-3.554 ; 20.965,-2.588 cw(c21.562,-2.588) 21.14,-2.166 ccw(c21.562,-2.588) 20.965,-2.588 ; v1@20.965,-2.254 ccw(c22.426,-2.254) 21.393,-3.287 cw(c22.426,-2.254) v1@20.965,-2.254 ; v1@21.015,-2.179 cw(c20.628,-2.773) 21.336,-2.773 ccw(c20.628,-2.773) v1@21.015,-2.179 ; U1.4@21.025,-3.664 ccw(c20.755,-3.393) 21.137,-3.393 cw(c20.755,-3.393) U1.4@21.025,-3.664 ; v1@21.097,-2.068 cw(c21.451,-2.423) 21.658,-1.966 ccw(c21.451,-2.423) v1@21.097,-2.068 ; 21.167,-2.417 cw(c21.576,-2.827) 21.576,-2.248 ccw(c21.576,-2.827) 21.167,-2.417 ; v1@21.169,-2.095 cw(c22.085,-2.095) 21.438,-1.448 ccw(c22.085,-2.095) v1@21.169,-2.095 ; 21.319,-1.845 cw(c22.212,-2.738) 22.212,-1.476 ccw(c22.212,-2.738) 21.319,-1.845 ; 21.336,-2.766 cw(c21.968,-2.766) 21.629,-2.232 ccw(c21.968,-2.766) 21.336,-2.766 ; v1@21.349,-2.235 ccw(c21.01,-1.897) 21.438,-1.682 cw(c21.01,-1.897) v1@21.349,-2.235 ; v1@21.381,-2.195 cw(c21.972,-2.052) 21.542,-1.623 ccw(c21.972,-2.052) v1@21.381,-2.195 ; v1@21.454,-1.823 ccw(c21.647,-1.337) 22.017,-1.707 cw(c21.647,-1.337) v1@21.454,-1.823 ; 21.501,-2.553 ccw(c21.332,-2.384) 21.504,-2.217 cw(c21.332,-2.384) 21.501,-2.553 ; v1@21.51,-1.837 ccw(c21.551,-1.368) 21.883,-1.701 cw(c21.551,-1.368) v1@21.51,-1.837 ; v1@21.643,-1.941 ccw(c21.402,-1.7) 21.706,-1.548 cw(c21.402,-1.7) v1@21.643,-1.941 ; v1@21.676,-2.148 cw(c22.254,-2.148) 21.845,-1.739 ccw(c22.254,-2.148) v1@21.676,-2.148 ; 21.768,-2.743 ccw(c22.537,-2.743) 21.993,-3.287 cw(c22.537,-2.743) 21.768,-2.743 ; C6.2@21.831,-1.333 cw(c22.212,-1.714) 22.212,-1.176 ccw(c22.212,-1.714) C6.2@21.831,-1.333 ; 22.123,-1.936 cw(c22.8,-1.936) 22.362,-1.421 ccw(c22.8,-1.936) 22.123,-1.936 ; C6.2@22.303,-1.408 cw(c21.939,-1.772) 22.454,-1.772 ccw(c21.939,-1.772) C6.2@22.303,-1.408 ; C6.2@22.358,-1.449 cw(c22.072,-1.988) 22.682,-1.988 ccw(c22.072,-1.988) C6.2@22.358,-1.449 ; 22.454,-1.833 cw(c23.055,-1.833) 22.63,-1.408 ccw(c23.055,-1.833) 22.454,-1.833
  Bottom Layer w0.3: v1(32.182,-2.87) 32.182,-6.452 32.563,-6.833 ; 32.385,-6.655 32.563,-6.833 ; v1(39.573,-8.204) 39.065,-7.696 35.306,-7.696 34.696,-8.306 34.036,-8.306 32.563,-6.833
  other v1: 21.576,-2.148 21.527,-1.637 56.54,-0.533 61.9,-0.533 55.753,-0.508 61.138,-0.508 66.624,-0.508 67.132,-0.508
VIN: C3.2 C4.1 D1.1 L2.2 P2.2 U2.1 | length 159.3
  Top Layer w0.2: C4.1@14.453,-4.623 14.732,-4.623 ; D1.1@14.932,-7.303 14.932,-6.785 ; 14.732,-4.623 cw(c14.732,-4.446) 14.583,-4.541 ccw(c14.732,-4.446) 14.732,-4.623 ; 14.732,-4.623 ccw(c14.732,-4.799) 14.583,-4.705 cw(c14.732,-4.799) 14.732,-4.623 ; 14.732,-4.623 15.316,-5.207 15.316,-6.401 14.932,-6.785 ; 14.932,-6.785 cw(c14.606,-6.785) 14.789,-7.055 ccw(c14.606,-6.785) 14.932,-6.785 ; 14.932,-6.785 ccw(c15.207,-6.785) 15.087,-7.033 cw(c15.207,-6.785) 14.932,-6.785 ; C4.1@14.453,-4.853 cw(c14.453,-6.083) 15.323,-5.213 ccw(c14.453,-6.083) C4.1@14.453,-4.853 ; C4.1@14.453,-4.653 cw(c14.453,-5.4) 14.981,-4.872 ccw(c14.453,-5.4) C4.1@14.453,-4.653
  Top Layer w0.3: U2.1@13.196,-4.436 14.666,-4.436 14.91,-4.191 ; 14.224,-4.216 14.325,-4.216 14.706,-3.835 ; L2.2@14.28,-2.255 14.503,-2.032 15.863,-3.392 ; L2.2@14.503,-2.388 14.706,-2.591 ; L2.2@14.503,-1.88 14.91,-2.286 14.91,-4.191 ; L2.2@14.681,-2.032 14.986,-2.032 16.078,-3.124 16.078,-3.48 ; 14.707,-4.623 14.497,-4.623 C4.1@14.31,-4.436 ; L2.2@14.783,-2.184 16.078,-3.48 ; v2(15.037,-3.15) 15.037,-2.921 14.706,-2.591 ; 15.326,-2.372 15.139,-2.559 ; 15.43,-2.832 15.488,-2.89 15.488,-3.957 ; 15.438,-2.484 15.342,-2.58 ; 15.609,-3.492 15.342,-3.759 ; 15.781,-3.664 15.488,-3.957 ; P2.2@2.519,-2.841 cw(c2.519,-3.31) 2.851,-2.978 ccw(c2.519,-3.31) P2.2@2.519,-2.841 ; P2.2@2.519,-2.841 cw(c2.519,-3.8) 3.198,-3.122 ccw(c2.519,-3.8) P2.2@2.519,-2.841 ; 2.751,-2.791 cw(c2.751,-3.647) 3.507,-3.244 ccw(c2.751,-3.647) 2.751,-2.791 ; 2.751,-2.791 3.324,-2.791 ; 2.751,-2.791 3.883,-2.791 4.064,-2.972 4.064,-3.404 3.912,-3.556 3.429,-3.556 2.751,-2.878 2.751,-2.791 ; 2.751,-2.791 2.867,-2.791 3.226,-3.15 3.324,-3.051 3.324,-2.791 ; 2.751,-2.791 3.324,-2.791 ; 3.324,-2.791 v2(3.683,-3.15) 3.324,-2.791 ; U2.1@13.196,-4.309 cw(c13.419,-4.531) 13.419,-4.216 ccw(c13.419,-4.531) U2.1@13.196,-4.309 ; U2.1@13.196,-4.309 13.196,-4.228 13.208,-4.216 14.529,-4.216 ; 14.148,-4.436 cw(c14.148,-4.655) 14.355,-4.581 ccw(c14.148,-4.655) 14.148,-4.436 ; 14.148,-4.436 C4.1@14.31,-4.436 ; L2.2@14.256,-2.277 cw(c13.167,-3.365) 14.706,-3.365 ccw(c13.167,-3.365) L2.2@14.256,-2.277 ; L2.2@14.256,-2.277 cw(c12.676,-3.857) 14.91,-3.857 ccw(c12.676,-3.857) L2.2@14.256,-2.277 ; C4.1@14.31,-4.436 14.706,-4.039 ; C4.1@14.379,-4.62 ccw(c13.934,-5.066) 13.934,-4.436 cw(c13.934,-5.066) C4.1@14.379,-4.62 ; C4.1@14.379,-4.62 ccw(c13.404,-5.595) 13.404,-4.216 cw(c13.404,-5.595) C4.1@14.379,-4.62 ; C4.1@14.453,-4.443 ccw(c14.453,-3.115) 15.391,-4.054 cw(c14.453,-3.115) C4.1@14.453,-4.443 ; C4.1@14.453,-4.443 ccw(c14.453,-3.945) 14.804,-4.297 cw(c14.453,-3.945) C4.1@14.453,-4.443 ; L2.2@14.468,-2.065 cw(c13.892,-2.641) 14.706,-2.641 ccw(c13.892,-2.641) L2.2@14.468,-2.065 ; L2.2@14.468,-2.065 cw(c13.4,-3.132) 14.91,-3.132 ccw(c13.4,-3.132) L2.2@14.468,-2.065 ; L2.2@14.503,-2.38 cw(c14.503,-3.219) 15.097,-2.625 ccw(c14.503,-3.219) L2.2@14.503,-2.38 ; L2.2@14.503,-2.38 cw(c14.503,-4.384) 15.921,-2.967 ccw(c14.503,-4.384) L2.2@14.503,-2.38 ; L2.2@14.503,-2.38 cw(c14.503,-3.526) 15.314,-2.715 ccw(c14.503,-3.526) L2.2@14.503,-2.38 ; 14.529,-4.216 ccw(c14.658,-4.346) 14.527,-4.474 cw(c14.658,-4.346) 14.529,-4.216 ; 14.529,-4.216 14.706,-4.039 ; C4.1@14.555,-4.528 cw(c15.095,-4.427) 14.706,-4.039 ; C4.1@14.555,-4.528 cw(c15.095,-4.427) 14.706,-4.039 ; C4.1@14.555,-4.528 cw(c15.095,-4.427) 14.706,-4.039 ; C4.1@14.555,-4.528 cw(c15.095,-4.427) 14.706,-4.039 ; 14.706,-4.039 14.706,-3.835 ; 14.706,-3.835 ccw(c15.169,-4.298) 14.551,-4.513 cw(c15.169,-4.298) 14.706,-3.835 ; 14.706,-3.835 14.706,-2.591 ; 14.706,-2.591 ccw(c15.066,-2.591) 15.047,-2.95 cw(c15.066,-2.591) 14.706,-2.591 ; 14.781,-4.664 ccw(c14.781,-5.018) 14.527,-4.771 cw(c14.781,-5.018) 14.781,-4.664 ; 14.781,-4.664 15.488,-3.957 ; 14.781,-4.664 14.894,-4.664 15.189,-4.369 16.078,-3.48 ; L2.2@14.853,-2.03 ccw(c15.704,-2.03) 15.102,-2.631 cw(c15.704,-2.03) L2.2@14.853,-2.03 ; L2.2@14.853,-2.03 ccw(c15.397,-2.03) 15.012,-2.414 cw(c15.397,-2.03) L2.2@14.853,-2.03 ; 14.91,-4.191 15.139,-3.963 ; 15.139,-3.963 15.342,-3.759 ; 15.139,-3.963 15.139,-2.559 ; 15.139,-2.559 cw(c14.61,-2.559) 14.92,-2.988 ccw(c14.61,-2.559) 15.139,-2.559 ; 15.342,-3.759 15.342,-2.58 ; 15.342,-2.58 cw(c14.968,-2.58) 15.013,-2.951 ccw(c14.968,-2.58) 15.342,-2.58 ; P2.2@2.523,-2.84 cw(c2.555,-3.218) 2.823,-2.95 ccw(c2.555,-3.218) P2.2@2.523,-2.84 ; P2.2@2.534,-2.838 cw(c2.683,-3.322) 3.041,-2.964 ccw(c2.683,-3.322) P2.2@2.534,-2.838 ; 3.251,-2.791 cw(c3.251,-3.38) 3.771,-3.103 ccw(c3.251,-3.38) 3.251,-2.791 ; 3.259,-3.116 cw(c3.529,-3.386) 3.737,-3.066 ccw(c3.529,-3.386) 3.259,-3.116 ; 3.751,-2.791 cw(c3.751,-3.113) 4.036,-2.961 ccw(c3.751,-3.113) 3.751,-2.791 ; U2.1@13.196,-4.559 cw(c13.493,-4.856) 13.493,-4.436 ccw(c13.493,-4.856) U2.1@13.196,-4.559 ; 14.129,-4.216 cw(c14.129,-4.871) 14.591,-4.408 ccw(c14.129,-4.871) 14.129,-4.216 ; C4.1@14.267,-4.611 cw(c14.666,-4.473) 14.368,-4.174 ccw(c14.666,-4.473) C4.1@14.267,-4.611 ; L2.2@14.286,-2.304 cw(c12.895,-4.064) 15.139,-4.064 ccw(c12.895,-4.064) L2.2@14.286,-2.304 ; C4.1@14.453,-4.743 ccw(c14.453,-4.139) 14.879,-4.566 cw(c14.453,-4.139) C4.1@14.453,-4.743 ; L2.2@14.472,-2.069 cw(c13.385,-3.445) 15.139,-3.445 ccw(c13.385,-3.445) L2.2@14.472,-2.069 ; L2.2@14.477,-2.379 cw(c14.458,-2.627) 14.706,-2.627 ccw(c14.458,-2.627) L2.2@14.477,-2.379 ; L2.2@14.503,-2.08 cw(c14.503,-3.36) 15.409,-2.455 ccw(c14.503,-3.36) L2.2@14.503,-2.08 ; C4.1@14.526,-4.773 cw(c14.788,-5.034) 14.788,-4.664 ccw(c14.788,-5.034) C4.1@14.526,-4.773 ; L2.2@14.658,-1.833 cw(c13.874,-2.825) 15.139,-2.825 ccw(c13.874,-2.825) L2.2@14.658,-1.833 ; L2.2@14.68,-1.853 cw(c14.125,-2.408) 14.91,-2.408 ccw(c14.125,-2.408) L2.2@14.68,-1.853 ; 14.706,-3.911 cw(c15.318,-3.911) 15.106,-3.337 ccw(c15.318,-3.911) 14.706,-3.911 ; 14.706,-3.48 cw(c15.159,-3.48) 15.002,-3.056 ccw(c15.159,-3.48) 14.706,-3.48 ; v2@14.706,-3.223 ccw(c15.033,-3.223) 15.016,-3.549 cw(c15.033,-3.223) v2@14.706,-3.223 ; v2@14.706,-3.05 cw(c15,-3.05) 14.898,-2.774 ccw(c15,-3.05) v2@14.706,-3.05 ; 14.706,-2.907 ccw(c15.049,-2.907) 15.032,-3.249 cw(c15.049,-2.907) 14.706,-2.907 ; L2.2@14.795,-2.323 cw(c13.968,-3.15) 15.137,-3.15 ccw(c13.968,-3.15) L2.2@14.795,-2.323 ; L2.2@14.799,-2.216 ccw(c15.157,-2.443) 14.858,-2.742 cw(c15.157,-2.443) L2.2@14.799,-2.216 ; v2@14.895,-3.291 cw(c14.308,-3.878) 15.139,-3.878 ccw(c14.308,-3.878) v2@14.895,-3.291 ; 14.91,-3.939 cw(c15.826,-3.939) 15.178,-3.291 ccw(c15.826,-3.939) 14.91,-3.939 ; L2.2@14.91,-2.361 ccw(c15.826,-2.361) 15.178,-3.008 cw(c15.826,-2.361) L2.2@14.91,-2.361 ; L2.2@14.916,-2.445 ccw(c15.464,-1.897) 15.898,-2.539 cw(c15.464,-1.897) L2.2@14.916,-2.445 ; 14.965,-2.756 cw(c15.042,-3.179) 15.346,-2.875 ccw(c15.042,-3.179) 14.965,-2.756 ; v2@14.969,-3.338 cw(c14.706,-4.074) 15.488,-4.074 ccw(c14.706,-4.074) v2@14.969,-3.338 ; v2@14.979,-3.341 cw(c14.829,-3.831) 15.342,-3.831 ccw(c14.829,-3.831) v2@14.979,-3.341 ; v2@15.019,-3.051 cw(c15.167,-3.863) 15.751,-3.279 ccw(c15.167,-3.863) v2@15.019,-3.051 ; v2@15.049,-3.249 ccw(c15.009,-2.918) 15.342,-2.918 cw(c15.009,-2.918) v2@15.049,-3.249 ; v2@15.066,-3.054 cw(c14.952,-3.426) 15.342,-3.426 ccw(c14.952,-3.426) v2@15.066,-3.054 ; v2@15.07,-3.055 cw(c14.858,-3.649) 15.488,-3.649 ccw(c14.858,-3.649) v2@15.07,-3.055 ; 15.085,-3.547 ccw(c15.05,-3.257) 15.342,-3.257 cw(c15.05,-3.257) 15.085,-3.547 ; 15.132,-2.534 ccw(c15.516,-2.15) 15.875,-2.557 cw(c15.516,-2.15) 15.132,-2.534 ; 15.153,-2.767 cw(c15.076,-3.021) 15.342,-3.021 ccw(c15.076,-3.021) 15.153,-2.767 ; 15.157,-2.203 ccw(c15.89,-1.471) 16.002,-2.501 cw(c15.89,-1.471) 15.157,-2.203 ; 15.171,-2.773 cw(c15.011,-3.223) 15.488,-3.223 ccw(c15.011,-3.223) 15.171,-2.773 ; 15.173,-2.702 ccw(c15.672,-2.204) 16.066,-2.788 cw(c15.672,-2.204) 15.173,-2.702 ; 15.307,-2.835 cw(c14.993,-3.15) 15.437,-3.15 ccw(c14.993,-3.15) 15.307,-2.835 ; 15.358,-2.76 ccw(c15.728,-2.39) 16.073,-2.782 cw(c15.728,-2.39) 15.358,-2.76 ; 15.43,-2.959 ccw(c15.879,-2.511) 16.234,-3.036 cw(c15.879,-2.511) 15.43,-2.959 ; 15.462,-4.096 ccw(c14.603,-3.236) 15.8,-3.025 cw(c14.603,-3.236) 15.462,-4.096 ; 15.57,-3.531 ccw(c15.023,-2.984) 15.796,-2.984 cw(c15.023,-2.984) 15.57,-3.531 ; 15.584,-2.986 ccw(c15.939,-2.63) 16.271,-3.007 cw(c15.939,-2.63) 15.584,-2.986 ; 15.6,-2.646 ccw(c15.977,-2.269) 16.035,-2.799 cw(c15.977,-2.269) 15.6,-2.646 ; 15.654,-3.447 ccw(c15.292,-3.086) 15.799,-3.016 cw(c15.292,-3.086) 15.654,-3.447 ; 15.87,-3.688 ccw(c15.295,-3.114) 16.095,-2.973 cw(c15.295,-3.114) 15.87,-3.688 ; C3.2@15.908,-3.183 cw(c15.728,-3.482) 16.078,-3.482 ccw(c15.728,-3.482) C3.2@15.908,-3.183 ; 16.078,-3.42 cw(c16.462,-3.42) 16.191,-3.148 ccw(c16.462,-3.42) 16.078,-3.42
  Bottom Layer w0.3: 14.224,-3.15 v2(15.037,-3.15) ; 14.554,-3.15 cw(c14.554,-3.632) 14.895,-3.291 ccw(c14.554,-3.632) 14.554,-3.15 ; 14.554,-3.15 ccw(c14.554,-2.667) 14.895,-3.008 cw(c14.554,-2.667) 14.554,-3.15
  Bottom Layer w0.6: v2(3.683,-3.15) 14.503,-3.15 ; 14.224,-3.15 v2(15.037,-3.15)
VS3: C8.1 C9.1 P3.5 P3.6 Q1.10 R6.2 U4.21 | length 103
  Top Layer w0.127: U4.21@37.167,-6.954 U4.21@37.167,-7.361 37.167,-8.49 38.456,-9.779 66.421,-9.779 67.234,-8.966 v1(67.564,-8.966) ; Q1.10@64.777,-1.698 65.049,-1.97 65.049,-3.099 65.611,-3.661 ; C8.1@64.999,-6.325 64.999,-5.893 ; C8.1@65.227,-6.325 65.303,-6.325 ; v1(65.938,-8.407) 65.938,-6.96 65.303,-6.325 ; 37.167,-7.827 cw(c37.303,-7.827) 37.207,-7.731 ccw(c37.303,-7.827) 37.167,-7.827 ; 37.167,-7.827 ccw(c37.031,-7.827) 37.127,-7.731 cw(c37.031,-7.827) 37.167,-7.827 ; 64.999,-5.893 cw(c64.762,-5.893) 64.893,-6.09 ccw(c64.762,-5.893) 64.999,-5.893 ; 64.999,-5.893 ccw(c65.235,-5.893) 65.104,-6.09 cw(c65.235,-5.893) 64.999,-5.893 ; 64.999,-5.893 65.611,-5.28 R6.2@65.611,-5.086 C9.1@65.611,-3.943 65.611,-3.661 ; 65.303,-6.325 cw(c65.303,-6.176) 65.17,-6.241 ccw(c65.303,-6.176) 65.303,-6.325 ; 65.303,-6.325 ccw(c65.303,-6.473) 65.17,-6.408 cw(c65.303,-6.473) 65.303,-6.325 ; 65.611,-4.626 cw(c65.151,-4.626) 65.477,-4.952 ccw(c65.151,-4.626) 65.611,-4.626 ; 65.611,-4.626 ccw(c66.071,-4.626) 65.746,-4.952 cw(c66.071,-4.626) 65.611,-4.626 ; 65.611,-4.403 cw(c66.071,-4.403) 65.746,-4.078 ccw(c66.071,-4.403) 65.611,-4.403 ; 65.611,-4.403 ccw(c65.151,-4.403) 65.477,-4.078 cw(c65.151,-4.403) 65.611,-4.403 ; 65.611,-3.661 cw(c65.497,-3.661) 65.54,-3.767 ccw(c65.497,-3.661) 65.611,-3.661 ; 65.611,-3.661 ccw(c65.726,-3.661) 65.683,-3.767 cw(c65.726,-3.661) 65.611,-3.661 ; 65.938,-7.957 cw(c65.488,-7.957) 65.807,-8.276 ccw(c65.488,-7.957) 65.938,-7.957 ; 65.938,-7.957 ccw(c66.389,-7.957) 66.07,-8.276 cw(c66.389,-7.957) 65.938,-7.957 ; Q1.10@64.867,-2.51 ccw(c64.426,-2.069) 65.049,-2.069 cw(c64.426,-2.069) Q1.10@64.867,-2.51 ; Q1.10@64.891,-2.794 cw(c64.671,-3.102) 65.049,-3.102 ccw(c64.671,-3.102) Q1.10@64.891,-2.794 ; Q1.10@64.957,-2.6 ccw(c64.732,-2.375) 65.049,-2.375 cw(c64.732,-2.375) Q1.10@64.957,-2.6 ; C8.1@64.999,-6.591 cw(c64.999,-7.971) 65.974,-6.995 ccw(c64.999,-7.971) C8.1@64.999,-6.591 ; C8.1@64.999,-6.464 cw(c64.999,-7.537) 65.757,-6.779 ccw(c64.999,-7.537) C8.1@64.999,-6.464 ; C8.1@64.999,-6.337 cw(c64.999,-7.104) 65.541,-6.562 ccw(c64.999,-7.104) C8.1@64.999,-6.337 ; C8.1@64.999,-6.21 cw(c64.999,-6.67) 65.324,-6.345 ccw(c64.999,-6.67) C8.1@64.999,-6.21 ; 65.049,-2.969 cw(c65.326,-2.969) 65.13,-2.773 ccw(c65.326,-2.969) 65.049,-2.969 ; Q1.10@65.049,-2.912 cw(c65.255,-2.912) 65.11,-2.767 ccw(c65.255,-2.912) Q1.10@65.049,-2.912 ; Q1.10@65.049,-2.314 ccw(c65.326,-2.314) 65.13,-2.51 cw(c65.326,-2.314) Q1.10@65.049,-2.314 ; 65.134,-5.758 ccw(c64.6,-5.224) 65.347,-5.114 cw(c64.6,-5.224) 65.134,-5.758 ; 65.173,-3.223 cw(c64.453,-3.943) 65.472,-3.943 ccw(c64.453,-3.943) 65.173,-3.223 ; 65.312,-5.579 ccw(c64.911,-5.178) 65.472,-5.095 cw(c64.911,-5.178) 65.312,-5.579 ; 65.39,-3.439 cw(c64.886,-3.943) 65.599,-3.943 ccw(c64.886,-3.943) 65.39,-3.439 ; 65.491,-5.4 ccw(c65.223,-5.132) 65.598,-5.077 cw(c65.223,-5.132) 65.491,-5.4 ; 65.607,-3.656 cw(c65.32,-3.943) 65.726,-3.943 ccw(c65.32,-3.943) 65.607,-3.656
  Bottom Layer w0.127: v1(65.938,-8.407) 66.65,-8.407 67.208,-8.966 ; v1(67.564,-8.966) 67.208,-8.966 ; 66.389,-8.407 cw(c66.389,-7.957) 66.07,-8.276 ccw(c66.389,-7.957) 66.389,-8.407 ; 66.389,-8.407 ccw(c66.389,-8.858) 66.07,-8.539 cw(c66.389,-8.858) 66.389,-8.407 ; 67.208,-8.966 cw(c67.208,-9.212) 67.411,-9.072 ccw(c67.208,-9.212) 67.208,-8.966 ; 67.208,-8.966 ccw(c67.208,-8.72) 67.411,-8.86 cw(c67.208,-8.72) 67.208,-8.966
  Bottom Layer w0.3: v1@64.541,-2.667 v1(64.541,-2.616) ; 64.77,-2.896 64.364,-2.896 ; v1@64.999,-2.718 v1(64.999,-2.642) 67.666,-2.642 ; 68.026,-3.002 67.92,-2.896 67.539,-2.896 64.364,-2.896 ; 69.39,-4.722 P3.6@69.901,-4.722 ; P3.6@69.748,-4.722 P3.6@69.746,-4.722 ; P3.6@69.952,-4.722 69.952,-4.699 69.746,-4.493 ; 64.364,-2.896 ccw(c64.364,-2.249) v1@64.914,-2.589 ; 64.364,-2.896 ccw(c64.364,-2.249) v1@64.914,-2.589 ; 64.364,-2.896 ccw(c64.364,-2.249) v1@64.914,-2.589 ; 64.364,-2.896 ccw(c64.364,-2.249) v1@64.914,-2.589 ; 64.364,-2.896 64.364,-2.489 67.31,-2.489 ; 64.902,-2.896 ccw(c64.902,-2.582) v1@65.169,-2.747 ; 64.902,-2.896 ccw(c64.902,-2.582) v1@65.169,-2.747 ; 64.902,-2.896 ccw(c64.902,-2.582) v1@65.169,-2.747 ; 64.902,-2.896 ccw(c64.902,-2.582) v1@65.169,-2.747 ; 67.31,-2.489 67.742,-2.489 68.859,-3.607 ; 67.31,-2.489 67.513,-2.489 67.666,-2.642 ; 67.666,-2.642 67.831,-2.807 68.275,-3.251 69.246,-4.222 ; 68.859,-3.607 69.746,-4.493 ; 68.859,-3.607 69.246,-3.993 69.246,-4.222 ; 69.246,-4.222 P3.6@69.746,-4.722 ; 69.317,-4.065 ccw(c69.66,-3.723) P3.5@69.66,-4.207 ; 69.317,-4.065 ccw(c69.66,-3.723) P3.5@69.66,-4.207 ; 69.317,-4.065 ccw(c69.66,-3.723) P3.5@69.66,-4.207 ; 69.317,-4.065 ccw(c69.66,-3.723) P3.5@69.66,-4.207 ; P3.6@69.644,-4.722 ccw(c68.848,-4.722) 69.411,-4.159 cw(c68.848,-4.722) P3.6@69.644,-4.722 ; P3.6@69.644,-4.722 ccw(c69.4,-4.722) 69.573,-4.549 cw(c69.4,-4.722) P3.6@69.644,-4.722 ; P3.5@69.649,-4.232 cw(c69.415,-4.466) 69.746,-4.466 ; P3.5@69.649,-4.232 cw(c69.415,-4.466) 69.746,-4.466 ; P3.5@69.649,-4.232 cw(c69.415,-4.466) 69.746,-4.466 ; P3.5@69.649,-4.232 cw(c69.415,-4.466) 69.746,-4.466 ; P3.6@69.746,-4.722 69.746,-4.493 ; v1@64.389,-2.489 cw(c64.389,-3.251) 64.928,-2.712 ccw(c64.389,-3.251) v1@64.389,-2.489 ; v1@64.4,-2.758 ccw(c64.733,-2.425) 64.733,-2.896 cw(c64.733,-2.425) v1@64.4,-2.758 ; v1@64.612,-2.687 cw(c65.089,-3.164) 65.089,-2.489 ccw(c65.089,-3.164) v1@64.612,-2.687 ; v1@64.612,-2.545 ccw(c65.457,-1.7) 65.457,-2.896 cw(c65.457,-1.7) v1@64.612,-2.545 ; v1@64.857,-2.783 ccw(c65.129,-2.511) 65.129,-2.896 cw(c65.129,-2.511) v1@64.857,-2.783 ; v1@65.069,-2.712 cw(c65.608,-3.251) 65.608,-2.489 ccw(c65.608,-3.251) v1@65.069,-2.712 ; v1@65.069,-2.571 ccw(c65.853,-1.787) 65.853,-2.896 cw(c65.853,-1.787) v1@65.069,-2.571 ; 69.44,-4.416 ccw(c69.659,-4.197) 69.67,-4.506 cw(c69.659,-4.197) 69.44,-4.416
pads on no net: U2.7 U4.12 U4.13 U4.14 U4.15 U4.17 U4.31 U4.32 U4.34

## Polygon pours and split planes (outlines as drawn)
GND on Top Layer "Top Layer-No Net" (solid, remove dead copper, pour order 1006): -1.549,3.023 -1.829,2.743 -1.829,-11.659 117.043,-11.659 117.881,-10.82 118.212,-10.49 118.212,3.683
VBAT_8V4 on Top Layer "Top Layer-No Net" (solid, remove dead copper, pour order 1007): 1.88,-7.112 1.88,-7.62 1.905,-7.645 1.956,-7.696 2.108,-7.696 3.277,-7.696 3.607,-7.366 4.318,-6.655 4.801,-6.655 5.309,-6.655 5.588,-6.934 5.715,-7.061 5.867,-7.061 6.655,-7.061 6.833,-6.883 6.858,-6.858 6.858,-6.604 6.909,-6.604 7.036,-6.477 7.061,-6.452 7.569,-6.452 11.1,-6.452 11.227,-6.579 11.379,-6.731 11.557,-6.731 11.836,-6.731 11.836,-6.477 11.836,-5.944 11.811,-5.918 11.608,-5.918 11.455,-5.918 11.354,-5.817 10.922,-5.385 10.719,-5.385 3.962,-5.385 3.556,-5.791 3.429,-5.918 3.429,-6.426 3.429,-6.934 3.251,-7.112
VCC on Top Layer "Top Layer-No Net" (solid, pour order 1013): 66.316,-2.235 67.172,-2.235 67.172,-1.118 67.417,-0.864 67.564,-0.711 67.564,-0.457 67.564,-0.279 67.491,-0.203 67.27,-0.203 65.729,-0.203 65.557,-0.381 65.557,-0.762 65.557,-2.921 65.606,-2.972 65.973,-2.972 66.169,-2.972 66.169,-2.667 66.169,-2.388 66.316,-2.235
VCC on Top Layer "Top Layer-No Net" (solid, pour order 1011): 61.007,-2.235 61.864,-2.235 61.864,-1.118 62.109,-0.864 62.255,-0.711 62.255,-0.457 62.255,-0.279 62.182,-0.203 61.962,-0.203 60.42,-0.203 60.249,-0.381 60.249,-0.762 60.249,-2.921 60.298,-2.972 60.665,-2.972 60.861,-2.972 60.861,-2.667 60.861,-2.388 61.007,-2.235
VCC on Top Layer "Top Layer-No Net" (solid, pour order 1009): 55.699,-2.235 56.555,-2.235 56.555,-1.118 56.8,-0.864 56.947,-0.711 56.947,-0.457 56.947,-0.279 56.873,-0.203 56.653,-0.203 55.111,-0.203 54.94,-0.381 54.94,-0.762 54.94,-2.921 54.989,-2.972 55.356,-2.972 55.552,-2.972 55.552,-2.667 55.552,-2.388 55.699,-2.235
PGND on Top Layer "Top Layer-No Net" (solid, remove dead copper, pour order 1012): 62.433,-3.2 62.433,-5.436 62.484,-5.486 63.144,-5.486 63.271,-5.486 63.322,-5.436 63.322,-5.385 63.322,-2.337 63.424,-2.235 63.652,-2.235 64.033,-2.235 64.033,-1.854 64.033,-0.406 63.983,-0.356 63.5,-0.356 63.271,-0.356 62.967,-0.66 62.433,-1.194 62.433,-2.743
PGND on Top Layer "Top Layer-No Net" (solid, remove dead copper, pour order 1010): 56.871,-3.277 56.871,-5.69 57.81,-5.69 57.887,-5.613 57.912,-5.588 57.912,-3.708 57.912,-2.388 58.014,-2.286 58.064,-2.235 58.217,-2.235 58.725,-2.235 58.725,-1.778 58.725,-0.483 58.699,-0.457 58.674,-0.432 58.014,-0.432 57.633,-0.432 57.455,-0.61 56.871,-1.194 56.871,-1.372
PGND on Top Layer "Top Layer-No Net" (solid, remove dead copper, pour order 1008): 51.537,-2.819 51.537,-5.486 51.562,-5.512 51.587,-5.537 51.613,-5.537 52.451,-5.537 52.502,-5.486 52.502,-5.41 52.502,-2.388 52.578,-2.311 52.629,-2.261 52.857,-2.261 53.416,-2.261 53.416,-2.108 53.416,-0.254 53.315,-0.152 53.188,-0.152 51.74,-0.152 51.562,-0.33
GND on Bottom Layer "Top Layer-No Net" (solid, remove dead copper, pour order 1014): -2.311,2.819 -2.311,-14.757 -2.438,-14.884 -2.057,-14.503 124.714,-14.503 124.714,1.321 120.65,5.385
VCC on Bottom Layer "Top Layer-No Net" (solid, remove dead copper, pour order 1015): 20.803,-1.321 20.803,-2.362 20.853,-2.413 20.904,-2.464 21.133,-2.464 21.971,-2.464 22.047,-2.388 22.073,-2.362 22.073,-1.88 22.073,-1.143 22.25,-0.965 22.301,-0.914 22.682,-0.914 67.793,-0.914 68.021,-0.686 68.047,-0.66 68.047,-0.33 68.047,-0.076 68.021,-0.051 60.782,-0.051 21.463,-0.051 20.803,-0.711
PGND on Bottom Layer "Top Layer-No Net" (solid, remove dead copper, pour order 1016): 50.851,-0.94 50.851,-3.81 50.952,-3.912 51.41,-3.912 63.195,-3.912 63.525,-3.581 63.576,-3.531 63.576,-2.692 63.576,-2.515 63.271,-2.21 62.205,-2.21 61.9,-2.21 61.671,-2.438 61.062,-3.048 59.715,-3.048 58.268,-3.048 58.064,-2.845 58.014,-2.794 58.014,-2.286 58.014,-1.778 57.836,-1.6 57.328,-1.6 56.388,-1.6 56.134,-1.854 54.966,-3.023 54.559,-3.023 52.73,-3.023 52.68,-2.972 52.527,-2.819 52.527,-2.667 52.527,-0.94

## Keep-outs
Keep-Out Layer:
  circle w0.1: c114,-2.25 r0.5
  circle w0.1: c114,-7.25 r0.5
  circle w0.1: c96,-2.25 r0.5
  circle w0.1: c96,-7.25 r0.5
  lines w0.1: 0,-10 117,-10 117,0 0,0 0,-10

## Silkscreen, mask and mechanical layers (free items; w line width, h text height)
Top Overlay:
  lines w0.1: 4.877,-1.956 4.877,-2.946 5.613,-2.946
Bottom Overlay:
  drawing of 23 lines, arcs and shapes, not listed
  text "20240331" at 115.875,-1.6 h1 r90
  text "LKS_074DO_V3.0" at 109.068,-2.073 h1